# Altium PCB RF Detector.PcbDoc
Units mm, origin at the board's own origin, x right, y up, seen from the top; angles counter-clockwise.
Board outline 48.49 x 48.11 mm, 2 copper layers (Top Layer, Bottom Layer), stack 0.871 mm thick; 20 components, 9 nets, 50 pads, 53 vias.
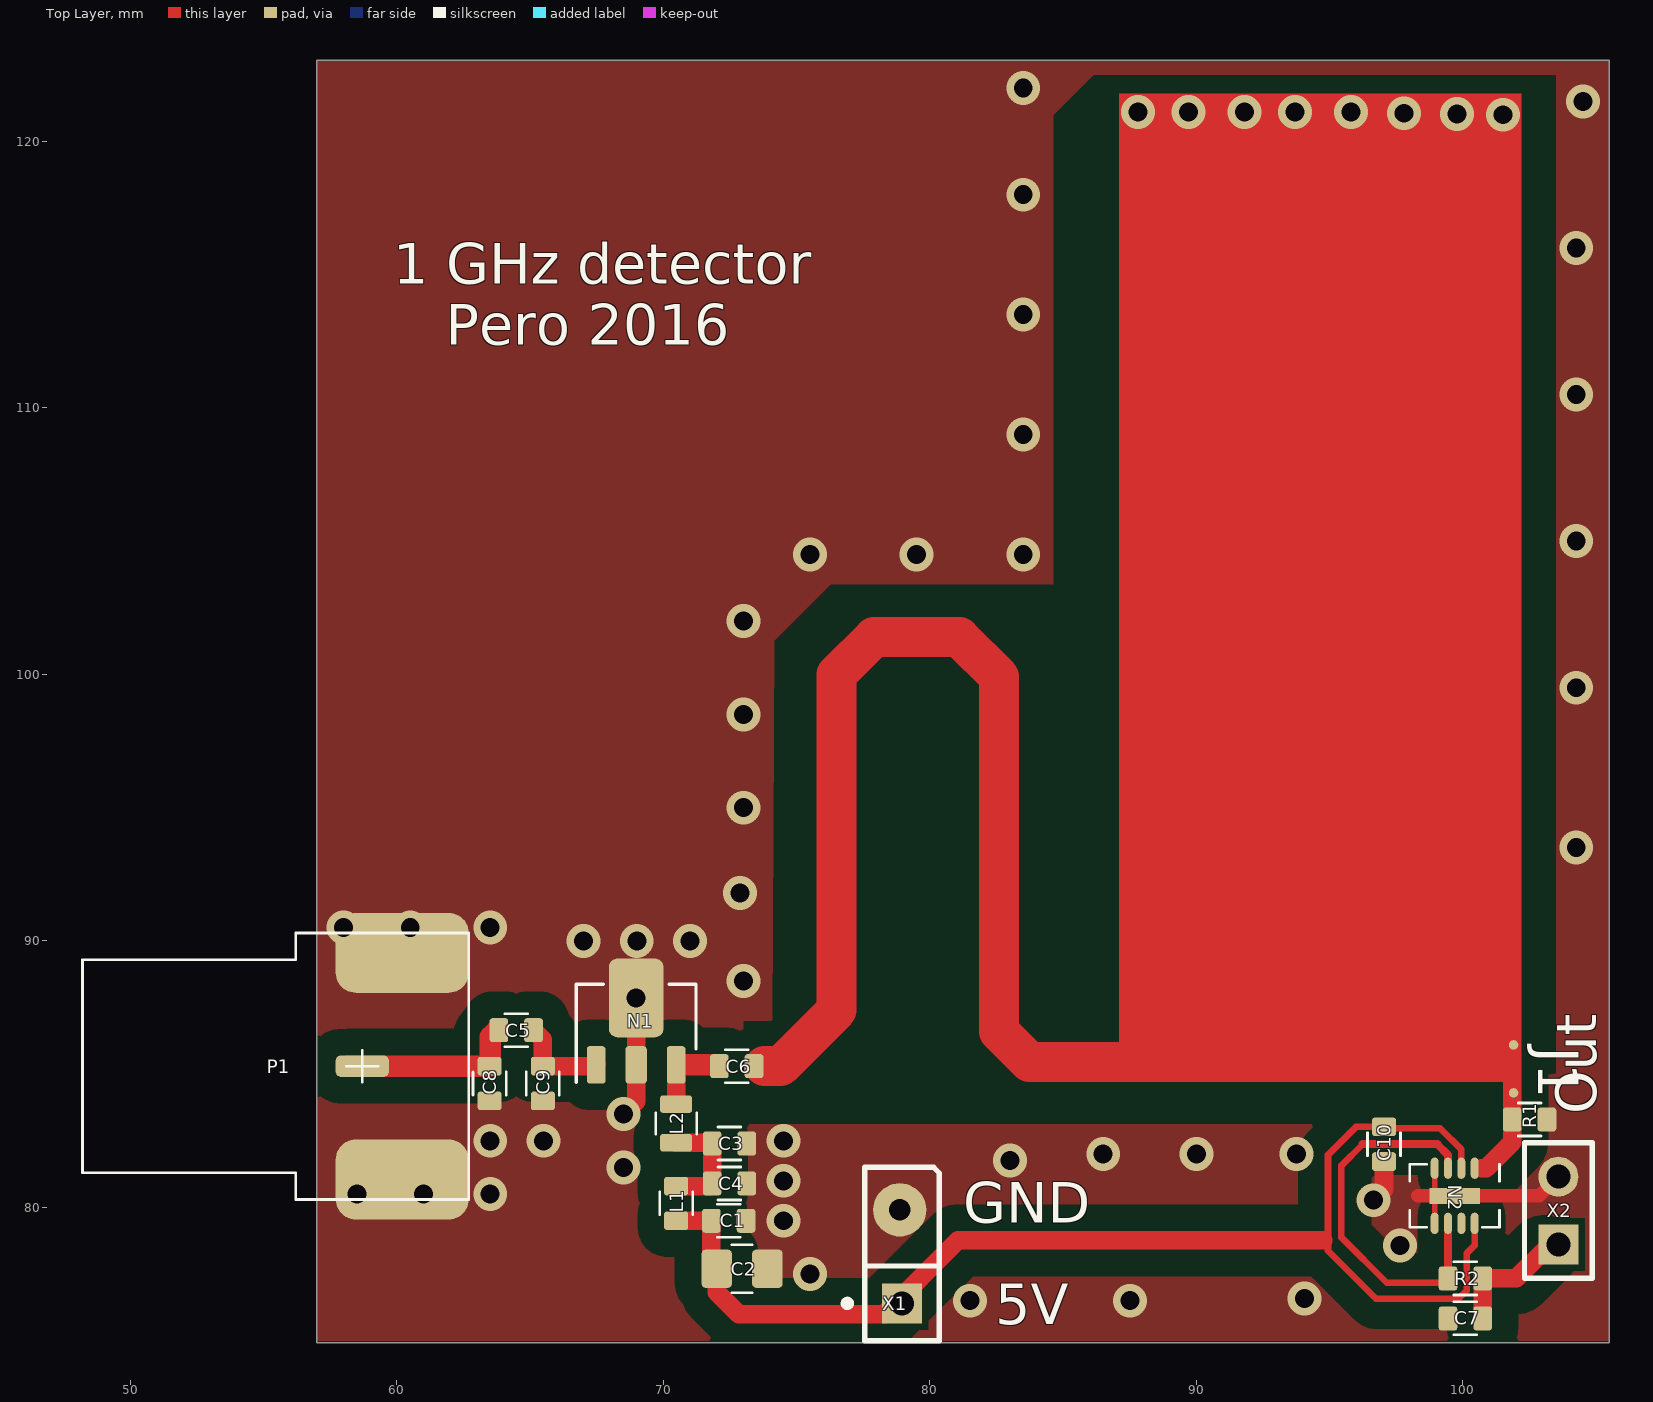
[diagram p0: Top Layer view]
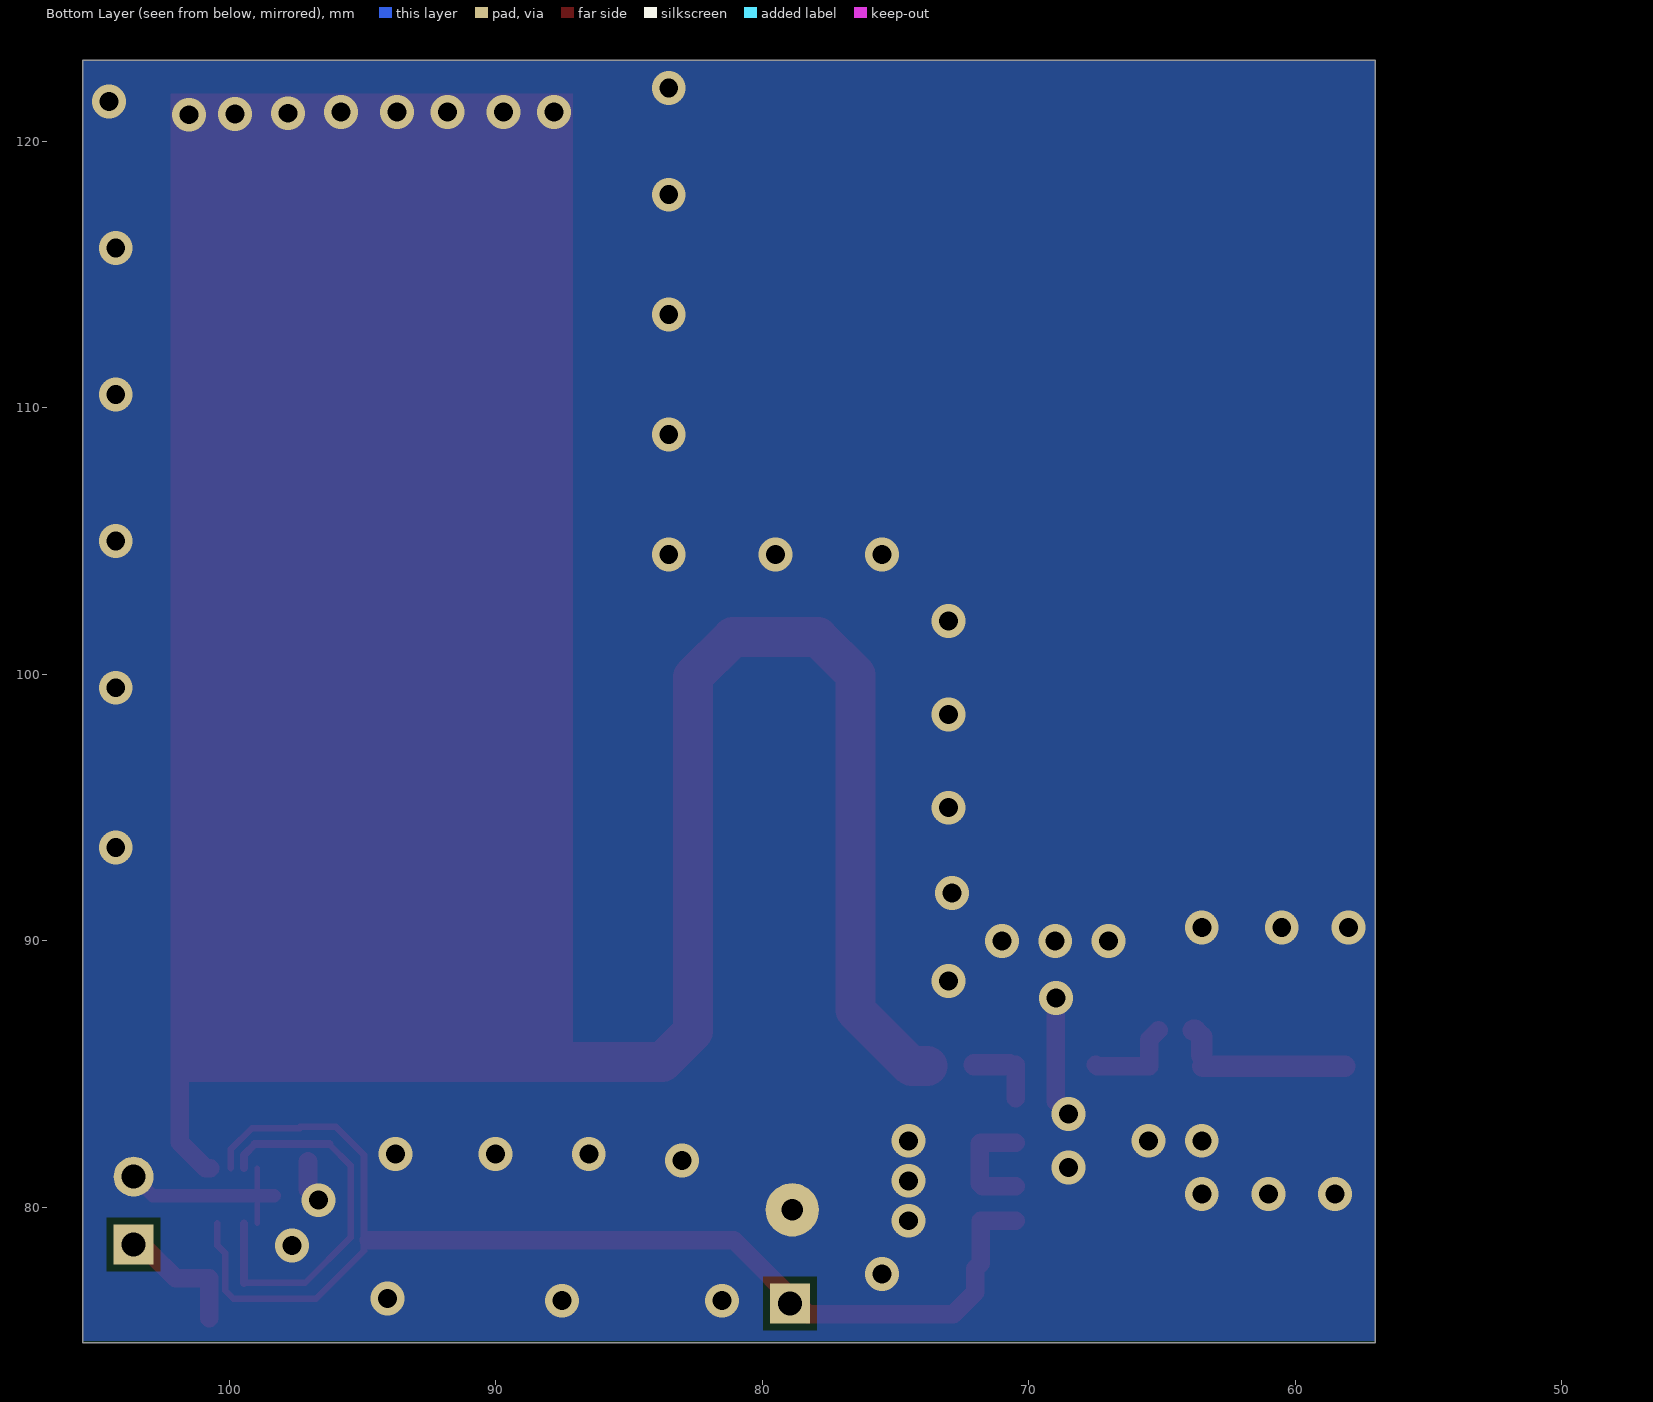
[diagram p1: Bottom Layer view, seen from below]
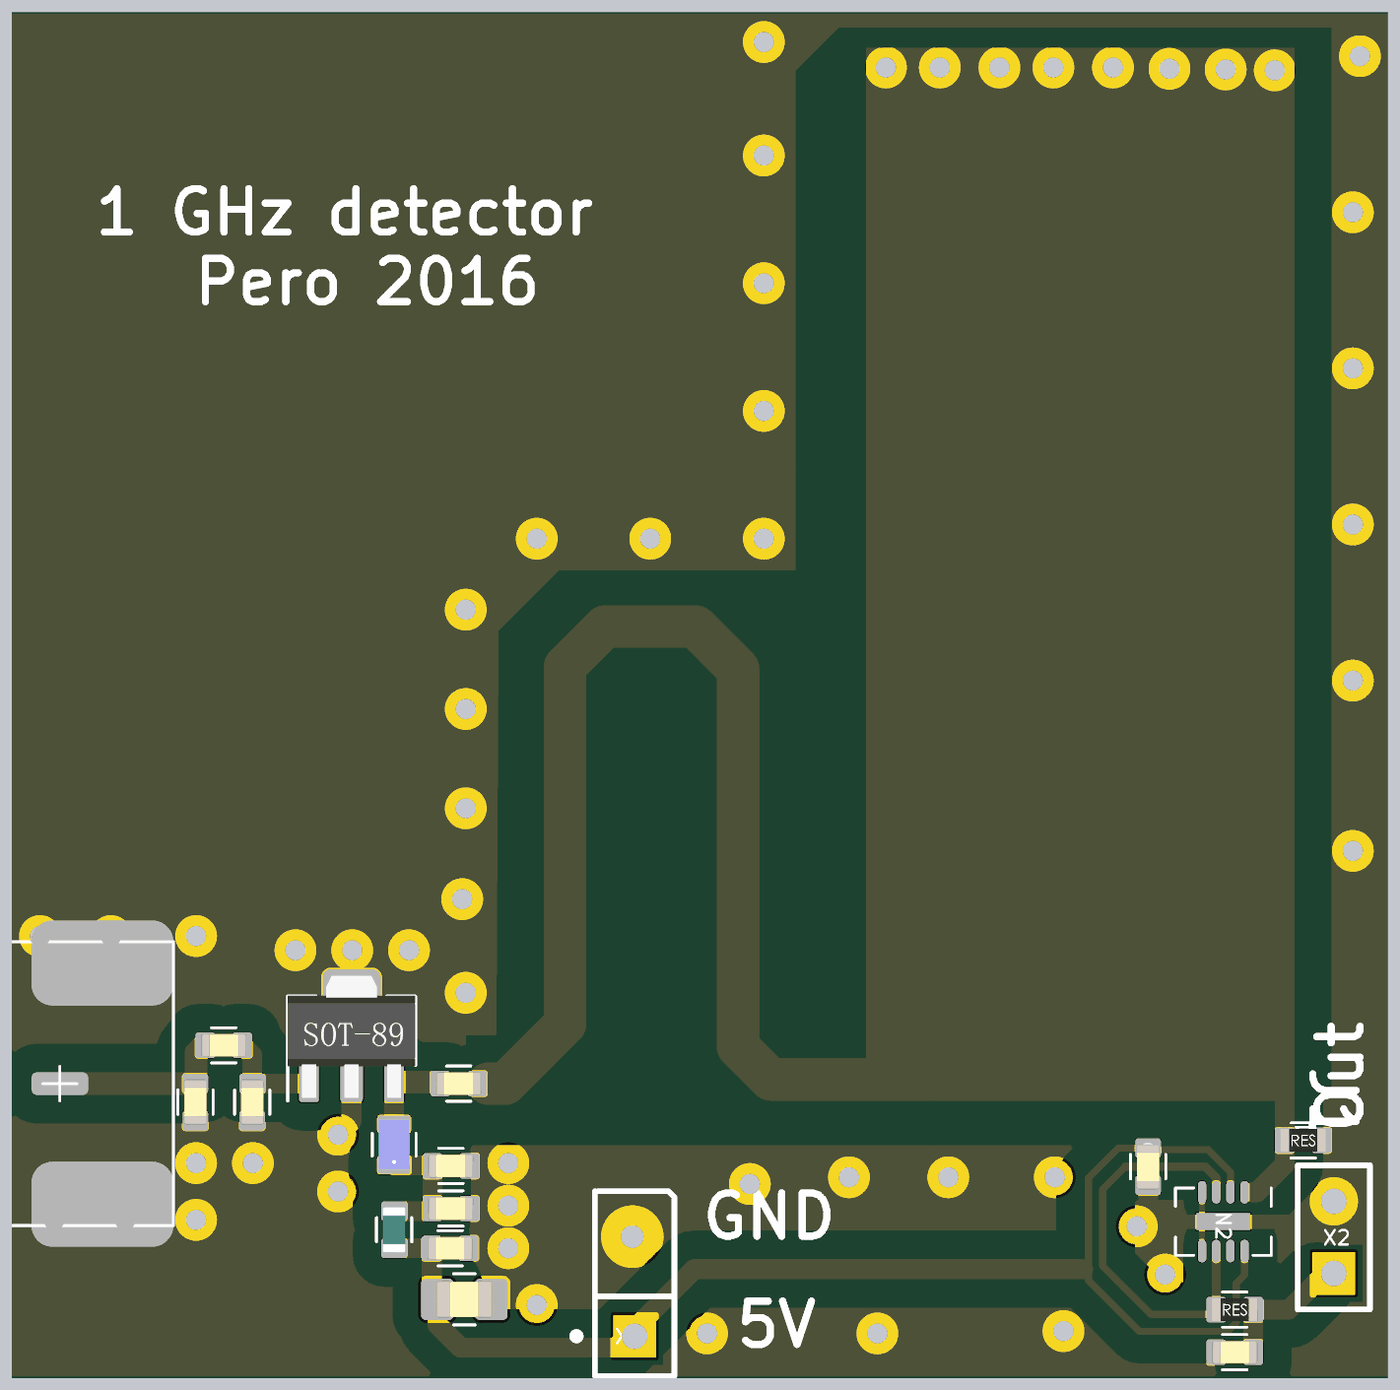
[diagram p2: 3D render of the assembled board from above, using the file's embedded part models]

## Layer stack, top to bottom
Top Solder: solder mask 0.0102, Solder Resist, Dk 3.5
Top Layer: signal copper 0.0356
Dielectric 1: dielectric 0.8, FR-4, Dk 4.8
Bottom Layer: signal copper 0.0356
Bottom Solder: solder mask 0.0102, Solder Resist, Dk 3.5

## Board outline
57,74.93 105.486,74.93 105.486,123.038 57,123.038

## Design rules (kind name [scope] priority, off if disabled: settings)
Clearance [All] p1: gap=0.254 except(0.1: Track-Track Track-SMDPad SMDPad-SMDPad; 1: Track-Poly SMDPad-Poly)
PolygonConnect [All] p1: connectstyle=Direct reliefconductorwidth=0.254 reliefentries=4 polygonreliefangle="90 Angle" airgapwidth=0.254
RoomDefinition "RF Detector CD" [InComponentClass('RF Detector CD')] p1: confinementstyle=ConfineIn formatcopy=TRUE lockcomponents=FALSE outline 47.6,69.672 111.633,69.672 111.633,126.675 47.6,126.675
RoutingVias [All] p1: holewidth=0.711 width=1.27 viastyle="Through Hole" minholewidth=0.711 minwidth=1.27 maxholewidth=0.711 maxwidth=1.27
ShortCircuit ShortCircuit_1 [InNet('NetJ1_2') vs InNet('GND')] p1: allowed=TRUE
ShortCircuit [All] p2: allowed=FALSE
SolderMaskExpansion [All] p1: expansion=0.102
Width [All] p1: maxlimit=30 minlimit=0.1 preferedwidth=0.254 bottomlayer_minwidth=0.254 minimp=50.000000 maximp=50.000000 favimp=50.000000
29 further rules are at their usual default settings.

## Classes and differential pairs
net class RF: GND NetC5_2 NetC6_1

## Components (designator, comment, footprint, x,y, rotation, side; value= is the part's Value field where it differs from the comment)
C1 "100nF" CAPC1608X90A 72.45,79.5 r180 top
C2 "1uF" CAPC2012X125N 72.95,77.7 r0 top
C3 "56pF" CAPC1608X90A 72.476,82.4 r180 top
C4 "100nF" CAPC1608X90A 72.476,80.9 r0 top
C5 "56pF" CAPC1608X90A 64.476,86.65 r0 top
C6 "56pF" CAPC1608X90A 72.75,85.3 r0 top
C7 "100nF" CAPC1608X90A 100.088,75.838 r180 top
C8 "56pF" CAPC1608X90A 63.476,84.65 r270 top
C9 "56pF" CAPC1608X90A 65.476,84.65 r90 top
C10 "100nF" CAPC1608X90A 97.038,82.373 r270 top
J1 "Value" SMDCUT_2_0.3_1.27_-_RR 101.9,85.2 r270 top net-tie
L1 "220R_100MHz" INDC1608X90A 70.476,80.15 r90 top
L2 "100nH" INDP1609X94L 70.476,83.15 r90 top
N1 "SBB_5089" SMD_SOT89-4_4.6x4.25_1.5 68.976,87.15 r0 top
N2 "AD8314ACPZ" ANALOG_LFCSP_VD_CP-8-1TN 99.688,80.438 r180 top
P1 "SMA_Jack" SMA_Jack_7x7x14mm 58.7,85.3 r180 top
R1 "56.2" RESC1608X45A 102.5,83.3 r0 top
R2 "10k" RESC1608X45A 100.088,77.338 r0 top
X1 "5V" PIN1 78.95,76.4 r90 top
X2 "To ADC" HDR1X2 103.581,78.613 r90 top

## Footprints (in the part's own frame and the unit in brackets; to place one, negate y for a bottom-side part, rotate by r counter-clockwise, add the part's x,y. Pads: shape width x height; smd on the part's side, far side on the other; paste and mask are expansions set on the pad)
ANALOG_LFCSP_VD_CP-8-1TN [mm] "8-Lead Lead Frame Chip Scale Package, 2 x 3 mm Body, Very Thin, Dual Lead (CP-8-1)"
  rrect100% 0.3x0.8 smd mask+0.03: 1(-0.75,-1.035) 2(-0.25,-1.035) 3(0.25,-1.035) 4(0.75,-1.035) 5(0.75,1.035) 6(0.25,1.035) 7(-0.25,1.035) 8(-0.75,1.035)
  rect 1.9x0.6 smd mask+0.051: G1(0,0)
  silkscreen extent -1.69,-1.18 1.69,1.18, body extent -1.62,-1.12 1.63,1.13, height 1
CAPC1608X90A [mm] "Capacitor, Chip, 1608, Alternate footprint, Zollner approved"
  rrect30% 0.7x0.9 smd mask+0.025: 1(-0.65,0) 2(0.65,0)
  silkscreen extent -0.43,-0.62 0.43,0.62, body extent -0.8,-0.41 0.8,0.41, height 0.92
CAPC2012X125N [mm]
  rrect30% 1.15x1.45 smd: 1(-0.95,0) 2(0.95,0)
  silkscreen extent -0.38,-0.9 0.38,0.9, body extent -1,-0.63 1,0.64, height 1.27
HDR1X2 [mm] "Connector; Header; 2 Position"
  rect 1.5x1.5 hole 0.9: 1(0,0)
  round 1.5 hole 0.9: 2(2.54,0)
  silkscreen extent -1.27,-1.27 3.81,1.27
INDC1608X90A [mm] "Inductor, Chip, 1608, Alternate footprint, Zollner approved"
  rrect30% 0.7x0.9 smd mask+0.025: 1(-0.65,0) 2(0.65,0)
  silkscreen extent -0.43,-0.62 0.43,0.62, body extent -0.8,-0.4 0.8,0.4, height 0.95
INDP1609X94L [mm] "Precision Wirewound Inductor, 1608, based on Coilcraft 0603HP, Custom pad shape 1.2x0.65mm"
  rrect30% 0.65x1.2 smd paste-0.025 mask+0.025: 1(-0.725,0) 2(0.725,0)
  silkscreen extent -0.4,-0.77 0.4,0.77, body extent -0.88,-0.54 0.87,0.55, height 0.93
PIN1 [mm] "Connector; Plug"
  rect 1.5x1.5 hole 0.9: 1(0,0)
  silkscreen extent -1.4,-1.4 1.4,2.17
RESC1608X45A [mm] "Resistor, Chip, 1608, Alternate footprint, Zollner approved"
  rrect30% 0.7x0.9 smd mask+0.025: 1(-0.65,0) 2(0.65,0)
  silkscreen extent -0.43,-0.62 0.43,0.62, body extent -0.8,-0.4 0.8,0.4, height 0.45
SMA_Jack_7x7x14mm [mm] "SMA Jack for PCB<=1.7mm, SMD edge mounting"
  rrect50% 2x0.8 smd mask+0: 1(0,0)
  rrect50% 5x3 smd mask+0: 2(-1.5,4.25) 3(-1.5,-4.25)
  silkscreen extent -4,-5 10.5,5
SMD_SOT89-4_4.6x4.25_1.5 [mm]
  rrect30% 0.7x1.4 smd mask+0.051: 1(-1.5,-1.8) 3(1.5,-1.8)
  rrect30% 0.8x1.4 smd mask+0.051: 2(0,-1.8)
  rrect30% 2.05x2.95 smd paste+0 mask+0.051: 4(0,0.71)
  silkscreen extent -2.25,-2.45 2.25,1.22, body extent -2.25,-2.35 2.25,1.95, height 1.51
SMDCUT_2_0.3_1.27_-_RR [mm] "Net tie, 0.355mm width"
  round 0.355 smd paste-1 mask-1: 1(-0.9,0) 2(0.9,0)
  Top Layer lines w0.355: 0.9,0 -0.9,0

## Part data
C1 C4 C7 C10: library part v39350-z2104-k2, "KERKO 0603 100N 50V 10% X7R"
C2: library part v39351-z105-k2, "KERKO 0805 1U 16V 5% X7R"
C3 C5 C6 C8 C9: library part ATC:600S560FT250XT, "KERKO 0603 56P 250V +-1% C0G"
J1: library part CUTSMD-WIDTH0.3MM, "Special SMD Cut component"
L1: library part v50010-g96-a1, "FERRIT 0603 220R 100MHZ 2A DCR=0R05"
L2: library part v50010-g27-a5, "DROSSEL SMD 0603 100N 0A22 2%"
N1: library part SIRENZA:SBB_5089, "50MHz to 6000MHz, CASCADABLE ACTIVE BIAS InGaP HBT MMIC AMPLIFIER"
N2: library part ANALOG_DEVICES:AD8314ACP, "100 MHz to 2.7 GHz, 45 dB RF Detector/Controller"
P1: library part RSCOMPONENTS:SMA_Jack, "SMA Jack edge mounted"
R1: library part v39244-z5560-f200, "WID CHIP 0603 56R2 1% TK100"
R2: library part v39244-z5103-f, "WID CHIP 0603 10K 1% TK100"
X1: library part Plug, "Plug"
X2: library part "Header 2", "Header, 2-Pin"

## Free pads (board coordinates)
  round 2 hole 0.8: 0(78.867,79.908)

## Via types
v1: diameter 1.27, hole 0.711, Top Layer to Bottom Layer, 53 vias

## Nets (pads, with @x,y where several pads share a name; then routed paths per layer and width w, separated by ;. In a path a pad name is that pad's centre, name@x,y a point inside that pad or via, vN(x,y) a via of type N, cw(c..) or ccw(c..) an arc to the next point about the centre after c; other vN are vias at no path point)
GND: C1.1 C2.2 C3.1 C4.2 C6.2 C7.2 C8.2 C9.1 C10.2 J1.1 N1.2 N1.4 N2.4 N2.5 N2.G1 P1.2 P1.3 pad.0 R1.2 X2.2 | length 55.7
  Top Layer w0.2: N2.5 N2.4
  Top Layer w0.5: 98.302,80.438 102.866,80.438 X2.2
  Top Layer w0.7: v1(68.5,83.5) 68.976,83.976 N1.2 v1(68.976,87.86) ; v1(96.638,80.273) 97.038,80.673 C10.2
  Top Layer w1.5: 73.8,85.3 74.394,85.3 76.5,87.406 76.5,100 77.9,101.4 81.1,101.4 82.594,99.906 82.594,86.6 83.744,85.45 87.275,85.45
  other v1: 81.5,76.5 87.5,76.5 94.056,76.581 75.5,77.5 97.638,78.573 74.5,79.5 58.5,80.5 61,80.5 63.5,80.5 74.5,81 68.5,81.5 83.007,81.763 86.5,82 90,82 93.75,82 63.5,82.5 65.5,82.5 74.5,82.5 73,88.5 67,90 69,90 71,90 58,90.5 60.5,90.5 63.5,90.5 72.875,91.8 104.25,93.5 73,95 73,98.5 104.25,99.5 73,102 75.5,104.5 79.5,104.5 83.5,104.5 104.25,105 83.5,109 104.25,110.5 83.5,113.5 104.25,116 83.5,118 101.5,121 99.771,121.031 97.79,121.056 87.8,121.1 89.7,121.1 91.8,121.1 93.7,121.1 95.8,121.1 104.5,121.5 83.5,122
NetC3_2: C3.2 C4.1 L1.2 L2.1 | length 4.1
  Top Layer w0.7: L1.2 C4.1@71.726,80.8 ; L2.1 C3.2@71.801,82.425 ; C4.1 C3.2
NetC5_1: C5.1 C8.1 P1.1 | length 6.5
  Top Layer w0.8: P1.1@58.126,85.3 C8.1 ; 63.5,85.7 63.5,86.4 63.75,86.65 C5.1
NetC5_2: C5.2 C9.2 N1.1 | length 3.5
  Top Layer w0.7: C5.2 65.476,86.3 C9.2 67.426,85.3 N1.1
NetC6_1: C6.1 L2.2 N1.3 | length 2.6
  Top Layer w0.7: L2.2@70.476,84.1 N1.3
  Top Layer w0.8: N1.3@70.7,85.35 C6.1@72.05,85.35
NetC7_1: C7.1 R2.2 X2.1 | length 4.2
  Top Layer w0.7: C7.1 R2.2 102.001,77.338 X2.1@103.022,78.359
NetJ1_2: J1.2 N2.1 R1.1 | length 4
  Top Layer w0.7: 100.7,81.473 100.878,81.473 101.85,82.444 101.85,84.9
NetN2_3: N2.3 N2.6 R2.1 | length 14.6
  Top Layer w0.25: 96.238,82.373 95.438,81.573 95.438,78.873 97.138,77.173 R2.1@99.438,77.173
  Top Layer w0.3: 96.238,82.373 99.038,82.373 99.438,81.973 N2.3 ; R2.1@99.438,77.173 99.438,78.373 N2.6
P5V: C1.2 C2.1 C10.1 L1.1 N2.2 N2.8 X1.1 | length 47.1
  Top Layer w0.25: C10.1@97.338,82.973 99.138,82.973 99.938,82.173 N2.2 ; C10.1@97.338,83.023 C10.1 95.988,83.023 94.938,81.973 94.938,78.373 96.738,76.573 99.838,76.573 100.138,76.873 100.138,78.273 100.438,78.573 N2.8
  Top Layer w0.7: L1.1 C1.2 71.8,77.9 C2.1 72,76.819 72.822,75.997 78.283,75.997 81.051,78.765 94.75,78.765
pads on no net: N2.7

## Polygon pours and split planes (outlines as drawn)
GND on Top Layer "GND_L01_P004" (solid, pour order 4): 57,123 105.5,123 105.5,75 57,75 57,123
GND on Bottom Layer "GND_L02_P006" (solid, pour order 6): 57,123 105.5,123 105.5,75 57,75 57,123

## Other copper
Top Layer:
  rectangle net GND: 87.1,84.7 102.2,121.8
  pour cut-out: 76.275,103.375 84.625,103.375 84.625,120.975 86.15,122.5 103.5,122.5 103.5,85.033 102.742,84.907 102.2,83.125 74.062,83.125 74.157,101.257
  pour cut-out: 75.043,87.994 74.049,87 73,87 73,83.235 73.11,83.125 74.991,83.125

## Silkscreen, mask and mechanical layers (free items; w line width, h text height)
Top Overlay:
  lines w0.2: 77.55,77.8 77.55,81.509 77.605,81.509 80.137,81.509 80.35,81.296 80.35,77.8
  text "1 GHz detector /    Pero 2016" at 59.868,112.37 h1.52
  text "Out" at 105,83.5 h1.52 r90
  text "GND" at 81.255,79.426 h1.52
  text "5V" at 82.448,75.616 h1.52
Mechanical 1:
  the board outline again, w0.5
Mechanical 13:
  lines w0.1: 77.6,75 77.6,81.5 80.4,81.5 80.4,75 77.6,75 ; 102.3,77.3 104.8,77.3 104.9,77.4 104.9,82.3 104.8,82.4 102.3,82.4 102.3,77.3

## Dimensions
105.486,74.93 to 105.486,123.038 on Mechanical 13
57,74.93 to 105.486,74.93 on Mechanical 13